# Altium PCB SHUIHU.PcbDoc
Units mil, origin at the board's own origin, x right, y up, seen from the top; angles counter-clockwise.
Board outline 4295 x 720 mil, 2 copper layers (Top Layer, Bottom Layer); 33 components, 18 nets, 71 pads, 9 vias.
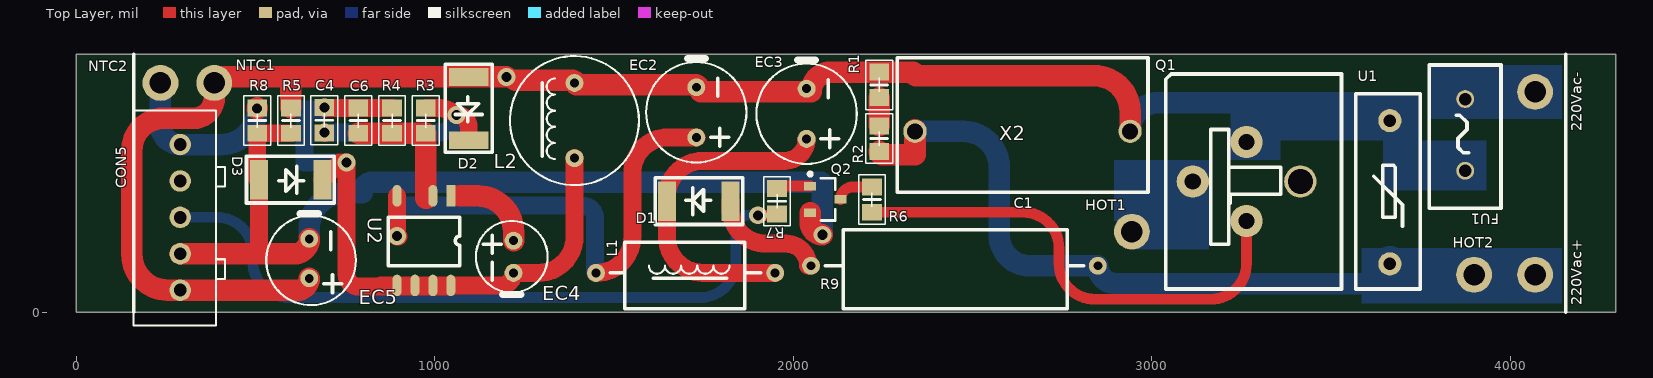
[diagram p0: Top Layer view]
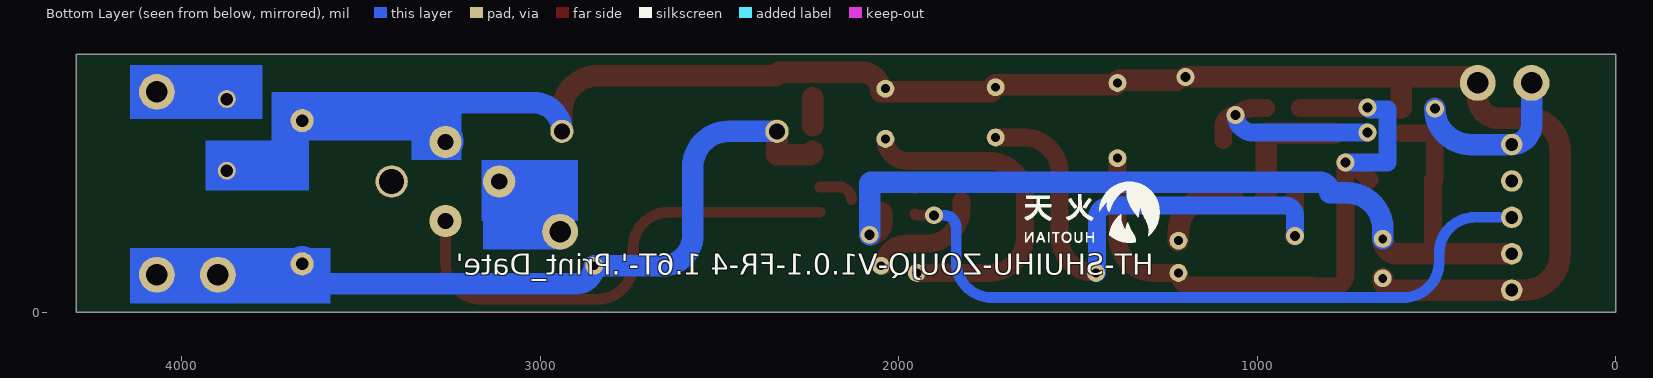
[diagram p1: Bottom Layer view, seen from below]

## Layer stack, top to bottom
Top Solder: solder mask 0.4, Solder Resist, Dk 3.5
Top Layer: signal copper 1.4
Dielectric 1: dielectric 12.6, FR-4, Dk 4.8
Bottom Layer: signal copper 1.4
Bottom Solder: solder mask 0.4, Solder Resist, Dk 3.5

## Board outline
0,0 0,720 4295,720 4295,0

## Design rules (kind name [scope] priority, off if disabled: settings)
Clearance [All] p1: gap=6 ignorepadtopadclearanceinfootprint=FALSE
PolygonConnect [All] p1: connectstyle=Relief reliefconductorwidth=10 reliefentries=4 polygonreliefangle="90 Angle" airgapwidth=10
RoutingVias [All] p1: holewidth=28 width=50 viastyle="Through Hole" minholewidth=28 minwidth=50 maxholewidth=28 maxwidth=50
SolderMaskExpansion [All] p1: expansion=4
UnRoutedNet [All] p1: checkbadconnections=TRUE
Width [All] p1: maxlimit=100 minlimit=10 preferedwidth=30
29 further rules are at their usual default settings.

## Components (designator, comment, footprint, x,y, rotation, side; value= is the part's Value field where it differs from the comment)
220Vac+ "焊接点" HanJie 4070,105 r90 top
220Vac- "焊接点" HanJie 4070,615 r90 top
C1 "X2-0.33uF" X2-AnGuiDianRong 2340,505 r0 top
C4 "电容" 6-0805_N 692.19,535.78 r270 top value=105
C6 "电容" 6-0805_N 787,535 r270 top value=102
CON5 "连接器" HEADER_5 390,563.2 r180 top
D1 "M7" ErJiGuan-M7 1825,310 r180 top
D2 "M7" ErJiGuan-M7 1095,657 r270 top
D3 "ES1J" ErJiGuan-M7 510,370 r0 top
EC2 "电容" DianRong-3.5mm 1729.97,627.93 r270 top value=4.7uF/400V
EC3 "电容" DianRong-3.5mm 2037.66,623.89 r270 top value=4.7uF/400V
EC4 "电容" DianRong-3.3mm 1220,110 r90 top value=4.7uF/50V
EC5 "电容" DianRong-3.2mm 650,205 r270 top value=220uF/16V
FU1 "T3.15A 250Vac" BaoXianSi 3875,595 r270 top
HOT1 "焊接点" HanJie 2945,225 r90 top
HOT2 "焊接点" HanJie 3900,105 r90 top
L1 "电感" DianGan-12.5mm 1950,110 r180 top value=1mH
L2 "电感" DianGan 1390,430 r90 top value=1mH
NTC1 "焊接点" HanJie 385,640 r90 top
NTC2 "焊接点" HanJie 235,640 r90 top
Q1 "BTA16-600B" BTA16-600B 3415,365 r90 top
Q2 "S8050" SOT-23_L 2090,315 r0 top
R1 "电阻" 6-0805_N 2240,634.57 r90 top value=470K
R2 "电阻" 6-0805_N 2240,484.57 r90 top value=470K
R3 "电阻" 6-0805_N 975,535 r90 top value=2.7K
R4 "电阻" 6-0805_N 881,535 r270 top value=2.4K
R5 "电阻" 6-0805_N 599,535 r90 top value=1K
R6 "电阻" 6-0805_N 2220,314.57 r90 top value=330R
R7 "电阻" 6-0805_N 1955,310 r270 top value=1K
R8 "电阻" 6-0805_N 505,535 r270 top value=1K
R9 "电阻" DianZhu-20mm 2850,130 r180 top value=22R
U1 "10471K" YaMinDianZhu 3665,135 r90 top
U2 "PN8015M" SOP7-PN8015M 1045,325 r270 top

## Footprints (in the part's own frame and the unit in brackets; to place one, negate y for a bottom-side part, rotate by r counter-clockwise, add the part's x,y. Pads: shape width x height; smd on the part's side, far side on the other; paste and mask are expansions set on the pad)
6-0805_N [mm] "Chip Resistor, Body 2.0x1.2mm, IPC Medium Density"
  rect 1.2x1.4 smd: 1(-0.9,0) 2(0.9,0)
  silkscreen extent -1.75,-0.95 1.75,0.95, body extent -1.07,-0.7 1.07,0.7, height 0.7
BaoXianSi [mil]
  round 50 hole 35: 1(0,0) 2(200,0)
  silkscreen extent -95,-100 305,100
BTA16-600B [mil]
  round 90 hole 45: 1(110,150) 2(0,300) 3(-110,150)
  round 90 hole 70: ""(0,0)
  silkscreen extent -300,-115 300,375
DianGan [mil]
  round 50 hole 25: 1(0,0) 2(210,0)
  silkscreen extent -75,-180 285,180
DianGan-12.5mm [mil]
  round 50 hole 25: 1(0,0) 2(500,0)
  silkscreen extent 40,-85 460,100
DianRong-3.2mm [mil]
  round 50 hole 25: 1(110,0) 2(0,0)
  silkscreen extent -70,-120 185,130
DianRong-3.3mm [mil]
  round 50 hole 25: 1(90,0) 2(0,0)
  silkscreen extent -60,-95 145,105
DianRong-3.5mm [mil]
  round 50 hole 25: 1(140,0) 2(0,0)
  silkscreen extent -80,-140 210,140
DianZhu-20mm [mil]
  round 50 hole 25: 1(0,0) 2(800,0)
  silkscreen extent 40,-100 760,120
ErJiGuan-M7 [mil]
  rect 50x110 smd: 1(0,0) 2(177,0)
  silkscreen extent -35,-65 210,65
HanJie [mil]
  round 100 hole 60: 1(0,0)
HEADER_5 [mil]
  round 60 hole 36: 1(100,501.4) 2(100,399.8) 3(100,298.2) 4(100,196.6) 5(100,95)
  silkscreen extent -25,0 230,600
SOP7-PN8015M [mil]
  rect 60x25 smd: 1(0,0)
  oval 60x25 smd: 2(0,-50) 3(0,-150) 4(250,-150) 5(250,-100) 6(250,-50) 7(250,0)
  silkscreen extent 60,-175 195,25
SOT-23_L [mm] "SOT23, 3-Leads, Body 2.9x1.3mm, Pitch 0.95mm, Lead Span 2.5mm, IPC High Density"
  rect 0.85x0.6 smd: 1(-1.075,0.95) 2(-1.075,-0.95) 3(1.075,0)
  silkscreen extent -1.2,-1.5 0.7,1.92, body extent -0.7,-1.5 0.7,1.5, height 1.1
X2-AnGuiDianRong [mil]
  round 65 hole 45: 1(0,0) 2(600,0)
  silkscreen extent -50,-170 650,205
YaMinDianZhu [mil]
  round 65 hole 35: 1(0,0) 2(400,0)
  silkscreen extent -70,-85 475,95

## Part data
220Vac+ 220Vac- HOT1 HOT2 NTC1 NTC2: library part PORT
C1 C4 C6: library part Cap, "Capacitor", LatestRevisionDate=17-Jul-2002, LatestRevisionNote="Re-released for DXP Platform.", PackageDescription="Radial Cap, Thru-Hole; 2 Leads; 0.3 in Pin Spacing", PackageReference=RAD-0.3, Published=8-Jun-2000, Publisher="Altium Limited"
CON5: library part "Header 5", "Header, 5-Pin", LatestRevisionDate=17-Jul-2002, LatestRevisionNote="Re-released for DXP Platform.", Publisher="Altium Limited"
D1: library part "Diode 1N4001", "1 Amp General Purpose Rectifier", Code_JEDEC=DO-204-AL, ComponentLink1Description="Manufacturer Link", ComponentLink1URL=http://www.fairchildsemi.com/, ComponentLink2Description=Datasheet, ComponentLink2URL=http://www.fairchildsemi.com/ds/1N%2F1N4001.pdf, DatasheetVersion=1998, LatestRevisionDate=17-Jul-2002, LatestRevisionNote="Re-released for DXP Platform.", PackageDescription="Diode, Axial; Body 5.2 x 2.7 mm (LxDia. max), Lead Dia. 0.86 mm (max)", PackageReference=DO-41, PackageVersion=Aug-1999, Published=8-Jun-2000, Publisher="Altium Limited"
D2: library part "Diode 1N4007", "1 Amp General Purpose Rectifier", Code_JEDEC=DO-204-AL, ComponentLink1Description="Manufacturer Link", ComponentLink1URL=http://www.fairchildsemi.com/, ComponentLink2Description=Datasheet, ComponentLink2URL=http://www.fairchildsemi.com/ds/1N%2F1N4001.pdf, DatasheetVersion=1998, LatestRevisionDate=17-Jul-2002, LatestRevisionNote="Re-released for DXP Platform.", PackageDescription="Diode, Axial; Body 5.2 x 2.7 mm (LxDia. max), Lead Dia. 0.86 mm (max)", PackageReference=DO-41, PackageVersion=Aug-1999, Published=8-Jun-2000, Publisher="Altium Limited"
D3: library part Diode, "Default Diode", Code_JEDEC=DO-214-AB, LatestRevisionDate=17-Jul-2002, LatestRevisionNote="Re-released for DXP Platform.", PackageDescription="DO-214-AB/SMC; 2 C-Bend Leads; Body 7.9 x 5.9 mm, inc. leads (LxW)", PackageReference=SMC, PackageVersion=Sep-1996, Published=8-Jun-2000, Publisher="Altium Limited"
EC2 EC3 EC4 EC5: library part "Cap Pol1", "Polarized Capacitor (Radial)", LatestRevisionDate=17-Jul-2002, LatestRevisionNote="Re-released for DXP Platform.", PackageDescription="Polarized Capacitor (Radial); 2 Leads", PackageReference=RB7.6-15, Published=8-Jun-2000, Publisher="Altium Limited"
FU1: library part "Fuse 2", "Fuse", LatestRevisionDate=17-Jul-2002, LatestRevisionNote="Re-released for DXP Platform.", PackageDescription="Thru-Hole; 2 Leads", PackageReference=PIN-W2/E2.8, Published=8-Jun-2000, Publisher="Altium Limited"
L1 L2: library part Inductor, "Inductor", Code_IEC=1005, Code_JEITA=0402, LatestRevisionDate=29-May-2009, LatestRevisionNote="IPC-7351 Footprint Added.", PackageDescription="Chip Inductor", PackageReference=0402-A, Published=8-Jun-2000, Publisher="Altium Limited"
Q1: library part Triac, "Silicon Bidirectional Triode Thyristor", ComponentLink1Description="Manufacturer Link", ComponentLink1URL=http://www.motorola.com/, DatasheetVersion=1999, LatestRevisionDate=17-Jul-2002, LatestRevisionNote="Re-released for DXP Platform.", Note="Pin 2 is electrically connected to Pin 4 (TAB)", PackageDescription="TO, Thru-Hole, Vertical, Heatsink Mounted; 3 In-Line Leads; Pitch 2.28 mm", PackageReference=369-03, Published=29-Sep-2000, Publisher="Altium Limited"
Q2: library part QNPN, "NPN Bipolar Transistor", LatestRevisionDate=29-May-2009, LatestRevisionNote="IPC-7351 Footprint Added.", PackageDescription="3-Pin SOT-23 Package 0.95 mm Pitch, 2.4 mm Lead Span", PackageReference=SOT-23B, PackageVersion=Aug-1999, Published=8-Jun-2000, Publisher="Altium Limited"
R1 R2 R3 R4 R5 R6 R7 R8 R9: library part Res2, "Resistor", LatestRevisionDate=17-Jul-2002, LatestRevisionNote="Re-released for DXP Platform.", PackageDescription="Axial Device, Thru-Hole; 2 Leads; 0.4 in Pin Spacing", PackageReference=AXIAL-0.4, Published=8-Jun-2000, Publisher="Altium Limited"
U1: library part "Res Varistor", "Varistor (Voltage-Sensitive Resistor)", Code_IPC=RESC2012, LatestRevisionDate=29-May-2009, LatestRevisionNote="IPC-7351 Footprint Added.", PackageDescription="Chip Resistor 0805 Case Size", PackageReference=6-0805, PackageVersion=Mar-2003, Published=24-Mar-1999, Publisher="Altium Limited"
U2: library part PN8015

## Via types
v1: diameter 50, hole 28, Top Layer to Bottom Layer, 9 vias

## Nets (pads, with @x,y where several pads share a name; then routed paths per layer and width w, separated by ;. In a path a pad name is that pad's centre, name@x,y a point inside that pad or via, vN(x,y) a via of type N, cw(c..) or ccw(c..) an arc to the next point about the centre after c; other vN are vias at no path point)
5V/0.2A: C1.2 CON5.1 D2.1 EC2.2 EC3.2 EC5.1 FU1.2 L2.2 NTC1.1 Q1.1 R1.2 R5.2 U1.2 | length 5258.9
  Top Layer w60: R5.2 599,655.68 ccw(c597.68,655.68) 597.68,657 ; EC5.1 cw(c616.8,95) 616.8,61.8 CON5.1 255.14,61.8 cw(c255.14,161.8) 155.14,161.8 155.14,452.07 cw(c244.52,452.07) 244.52,541.45 327.44,541.45 ccw(c327.44,599.01) 385,599.01 NTC1.1 cw(c402,640) 402,657 597.68,657 ; v1(1200,657) D2.1 599,657 597.68,657 ; 1225,647 1383,647 cw(c1383,635) 1395,635 1725,635 cw(c1725,620) 1740,620 ccw(c1745,620) 1745,615 2050,615 cw(c2105,615) 2105,670 R1.2 2335,670 ccw(c2345,670) 2345,660 2840,660 cw(c2840,560) 2940,560 C1.2
  Bottom Layer w60: NTC1.1 cw(c392,640) NTC1.1@392,647 ; C1.2 cw(c3020,505) 3020,585 3265,585 Q1.1@3265,480
  Bottom Layer w100: Q1.1@3265,480 Q1.1 cw(c3325,475) 3325,535 U1.2 cw(c3665,500) 3700,500 3700,420 3850,420 3860,410 cw(c3860,395) FU1.2
220V-N: 220Vac+.1 C1.1 HOT2.1 R2.1 R9.1 U1.1 | length 2277.9
  Top Layer w60: R2.1 ccw(c2249.13,449.13) 2249.13,440 2340,440 C1.1 C1.1@2340,510
  Bottom Layer w60: C1.1 2475,505 cw(c2475,405) 2575,405 2575,215 ccw(c2660,215) 2660,130 R9.1 ccw(c2900,130) 2900,80 3610,80 ccw(c3610,135) U1.1
  Bottom Layer w100: U1.1 ccw(c3695,135) 3695,105 HOT2.1 220Vac+.1
GND: CON5.2 D3.1 EC5.2 Q2.2 R5.1 R8.2 | length 2576.2
  Top Layer w50: 509.77,163.4 510,163.4 D3.1 cw(c510,375) 505,375 R8.2 R5.1
  Top Layer w60: CON5.2 509.77,163.4 ; 510,163.4 608.4,163.4 ccw(c608.4,205) EC5.2 ; Q2.2 2047.68,250.59 ccw(c2081.78,250.59) v1(2081.78,216.49)
  Bottom Layer w60: EC5.2 650,233.35 cw(c750,233.35) 750,333.35 797.5,333.35 cw(c827.58,333.35) 827.58,363.43 2075.99,363.43 cw(c2075.99,358.8) 2080.62,358.8 2080.62,217.65 ccw(c2081.78,217.65) v1(2081.78,216.49)
HOT: CON5.3 R7.2 | length 1977.5
  Top Layer w30: v1(1901.62,270.79) 1951.23,270.79 ccw(c1951.23,274.57) R7.2
  Bottom Layer w30: CON5.3 392.57,265 cw(c392.57,165) 492.57,165 492.57,141.07 ccw(c592.57,141.07) 592.57,41.07 1740.22,41.07 ccw(c1740.22,141.07) 1840.22,141.07 1840.22,236.92 cw(c1874.09,236.92) 1874.09,270.79 v1(1901.62,270.79)
Net220Vac-_1: 220Vac-.1 FU1.1 | length 206.4
  Bottom Layer w100: FU1.1 cw(c3895,595) 3895,615 220Vac-.1
NetC4_1: C4.1 C6.1 D3.2 EC4.2 L2.1 R4.1 U2.4 U2.5 U2.6 U2.7 | length 2060.8
  Top Layer w50: D3.2 687,370.22 734.93,418.15 v1(754.12,418.15) 754.12,105.95 ccw(c787.89,105.95) 787.89,72.17 1042.17,72.17 ccw(c1042.17,75) U2.7 ; v1(692.19,571.22) ccw(c692.97,571.22) 692.97,570.43 C6.1 R4.1 ; 849.89,75 U2.4 U2.5 U2.6 U2.7 ; L2.1 1390,210 cw(c1290,210) 1290,110 EC4.2 cw(c1185,110) 1185,75 U2.7
  Bottom Layer w50: v1(692.19,571.22) ccw(c692.19,566.03) 687,566.03 636.95,566.03 636.95,418.15 v1(754.12,418.15)
NetC4_2: C4.2 D2.2 R3.2 | length 578.1
  Top Layer w50: C4.2 692.19,500.9 cw(c692.95,500.9) v1(692.95,501.66) ; R3.2 1004.57,570.43 cw(c1004.57,480) v1(1060.49,551.07) cw(c1060.49,516.56) 1095,516.56 D2.2
  Bottom Layer w50: v1(692.95,501.66) 1011.09,501.66 ccw(c1011.09,551.07) v1(1060.49,551.07)
NetC6_2: C6.2 R3.1 R4.2 U2.2 | length 371.2
  Top Layer w60: C6.2 R4.2 R3.1 975,320.2 ccw(c977.44,320.2) 977.44,317.76
NetD1_1: D1.1 R9.2 | length 335.6
  Top Layer w50: D1.1 1825,291.59 ccw(c1925,291.59) 1925,191.59 1980.41,191.59 cw(c1980.41,130) 2042,130 R9.2
NetD1_2: D1.2 EC3.1 L1.1 | length 953.3
  Top Layer w50: L1.1 1748,110 cw(c1748,210) 1648,210 D1.2 1648,322.37 cw(c1748,322.37) 1748,422.37 1976.13,422.37 ccw(c1976.13,483.89) EC3.1
NetEC2_1: EC2.1 L1.2 U2.3 | length 1492.8
  Top Layer w50: v1(894.53,213.06) ccw(c895.76,213.06) 895.76,211.83 899.43,211.83 cw(c899.43,216.26) 895,216.26 U2.3 ; L1.2 1451.36,110 ccw(c1451.36,210) 1551.36,210 1551.36,387.93 cw(c1651.36,387.93) 1651.36,487.93 EC2.1
  Bottom Layer w50: v1(894.53,213.06) 894.53,269.22 cw(c923.11,269.22) 923.11,297.8 1412.15,297.8 cw(c1412.15,262.32) 1447.63,262.32 1447.63,112.37 ccw(c1450,112.37) L1.2
NetEC4_1: EC4.1 U2.1 | length 232.1
  Top Layer w60: 1070,325 1120,325 cw(c1120,225) 1220,225 EC4.1
NetHOT1_1: HOT1.1 Q1.2 | length 220.2
  Bottom Layer w100: HOT1.1 Q1.2
NetQ1_3: Q1.3 R6.1 | length 1377.3
  Top Layer w30: R6.1 2641.8,279.13 cw(c2641.8,179.13) 2741.8,179.13 2741.8,136.52 ccw(c2841.8,136.52) 2841.8,36.52 3165,36.52 ccw(c3165,136.52) 3265,136.52 Q1.3
NetQ2_1: Q2.1 R7.1 | length 96.7
  Top Layer w30: R7.1 cw(c1961.97,345.43) 1961.97,352.4 Q2.1
NetQ2_3: Q2.3 R6.2 | length 107.7
  Top Layer w30: Q2.3 cw(c2167.32,315) 2167.32,350 R6.2
NetR1_1: R1.1 R2.2 | length 79.1
  Top Layer w60: R2.2 R1.1
NTC: CON5.5 NTC2.1 R8.1 | length 477.6
  Top Layer w60: v1(504.71,568.08) 504.71,570.43 R8.1
  Bottom Layer w60: NTC2.1 235,523.2 ccw(c290,523.2) CON5.5 404.83,468.2 ccw(c404.83,568.08) v1(504.71,568.08)
pads on no net: CON5.4 Q1.

## Other copper
Bottom Layer:
  rectangle net NetHOT1_1: 2940,175 3160,275
  rectangle net NetHOT1_1: 2895,255 3165,425
  rectangle net 5V/0.2A: 3220,425 3360,615
  rectangle net 5V/0.2A: 3220,480 3750,615
  rectangle net 5V/0.2A: 3645,340 3935,480
  rectangle net Net220Vac-_1: 3775,540 4145,690
  rectangle net 220V-N: 3585,25 4145,180

## Silkscreen, mask and mechanical layers (free items; w line width, h text height)
Top Overlay:
  lines w10: 160,0 160,720 ; 3215,425 3215,405 3225,405 3360,405 3360,330 3220,330 3220,305 ; 4155,0 4155,720 ; 3165,190 3215,190 3215,510 3165,510 3165,190
Bottom Overlay:
  drawing of 1923 lines, arcs and shapes, not listed
  text "HT-SHUIHU-ZOUJQ-V1.0.1-FR-4 1.6T-'.Print_Date'" at 1289.26,85.93 h100
Bottom Solder:
  rectangle: 3665,365 3735,575
  rectangle: 3230,495 3730,575
  rectangle: 3230,430 3320,575
  rectangle: 3675,365 3920,440
  rectangle: 3825,560 4135,670
  rectangle: 3825,50 4125,160
  lines w100: 2945,225 3115,365
Mechanical 1:
  lines w6: 300,585 300,700 320,700 320,585 300,585 ; 1650,525 1650,570 2165,570 2165,525 1650,525 ; 2795,435 2795,460 3130,460 3130,435 2795,435 ; 2820,230 2835,245 2945,135 2930,120 2820,230 ; 3070,640 3070,680 3510,680 3510,640 3070,640 ; 3175,200 3175,500 3205,500 3205,395 3345,395 3345,340 3205,340 3205,200 3175,200 ; 3370,220 3370,285 3950,285 3950,315 4145,315 4145,220 3370,220 ; 3375,430 3375,470 3635,470 3635,430 3375,430
  lines w10: 0,0 4295,0 4295,720 0,720 0,0

## Text inside footprints (layer, text, board x,y; h text height)
C1: Top Overlay "X2" at 2575,480 h40